# Altium PCB MainBoard.PcbDoc
Units mil, origin at the board's own origin, x right, y up, seen from the top; angles counter-clockwise.
Board outline 1122 x 925 mil, 2 copper layers (Top1, Bottom4), stack 42.17 mil thick; 34 components, 52 nets, 216 pads, 117 vias.
Unrouted connection lines stored in the file: 28.
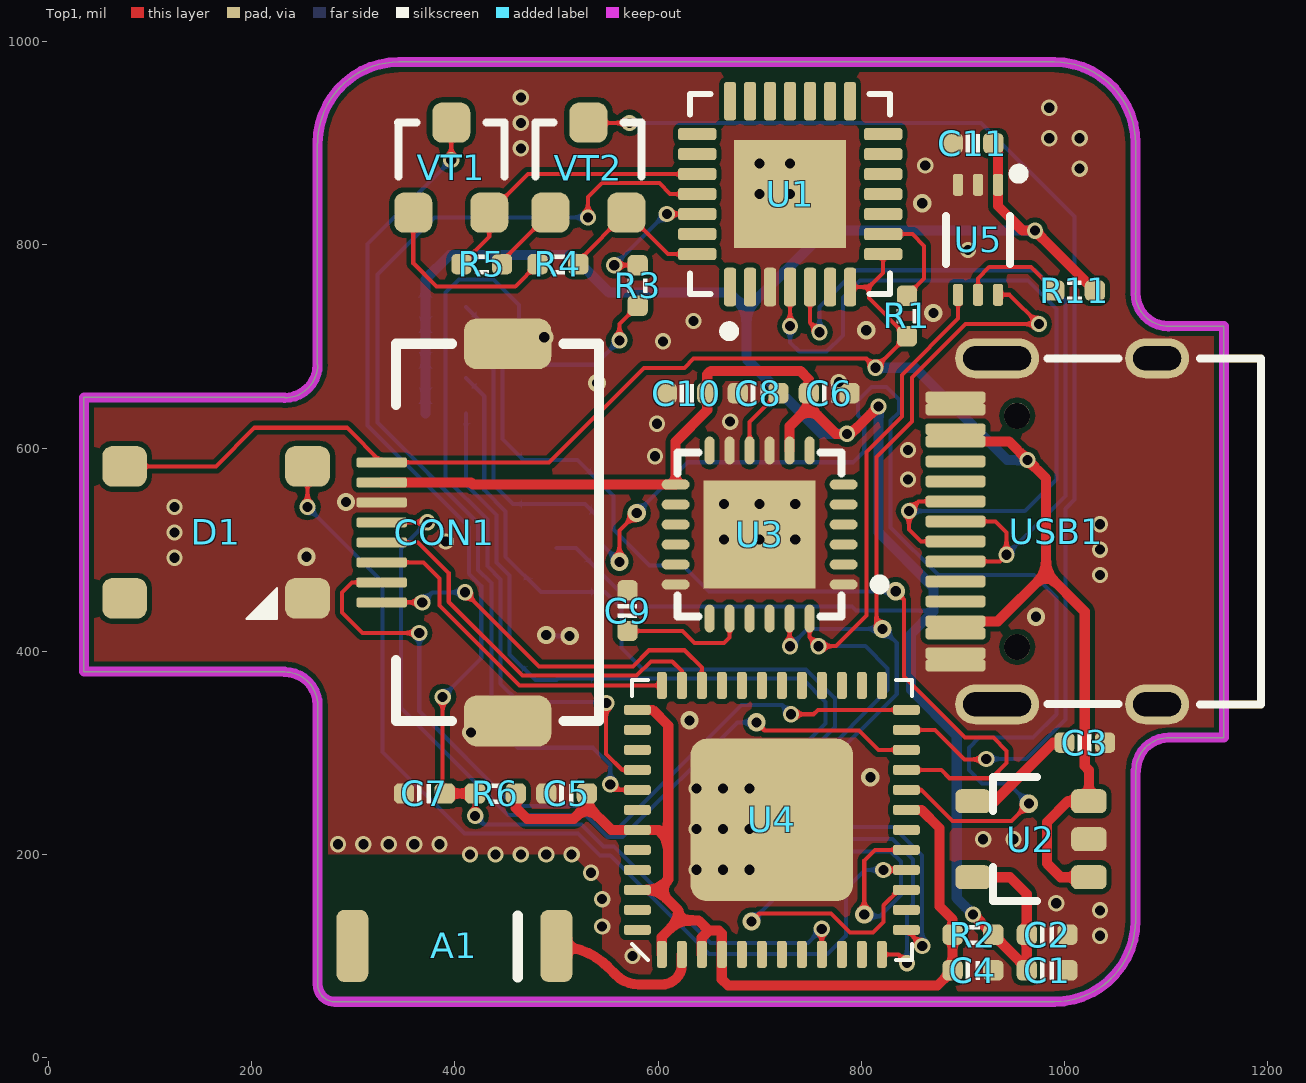
[diagram p0: Top1 view]
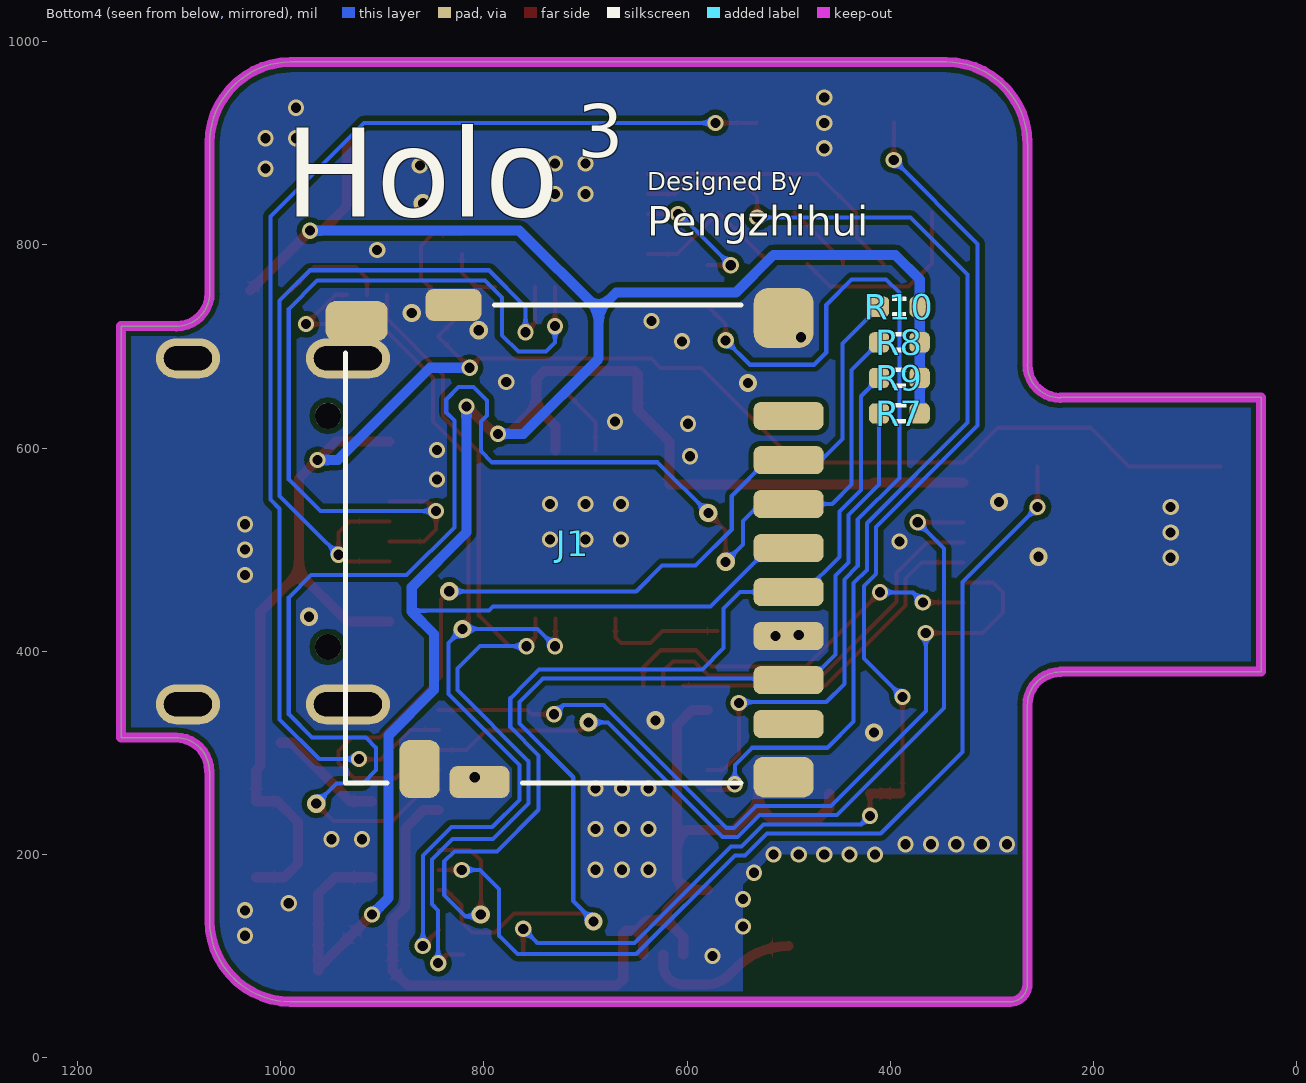
[diagram p1: Bottom4 view, seen from below]
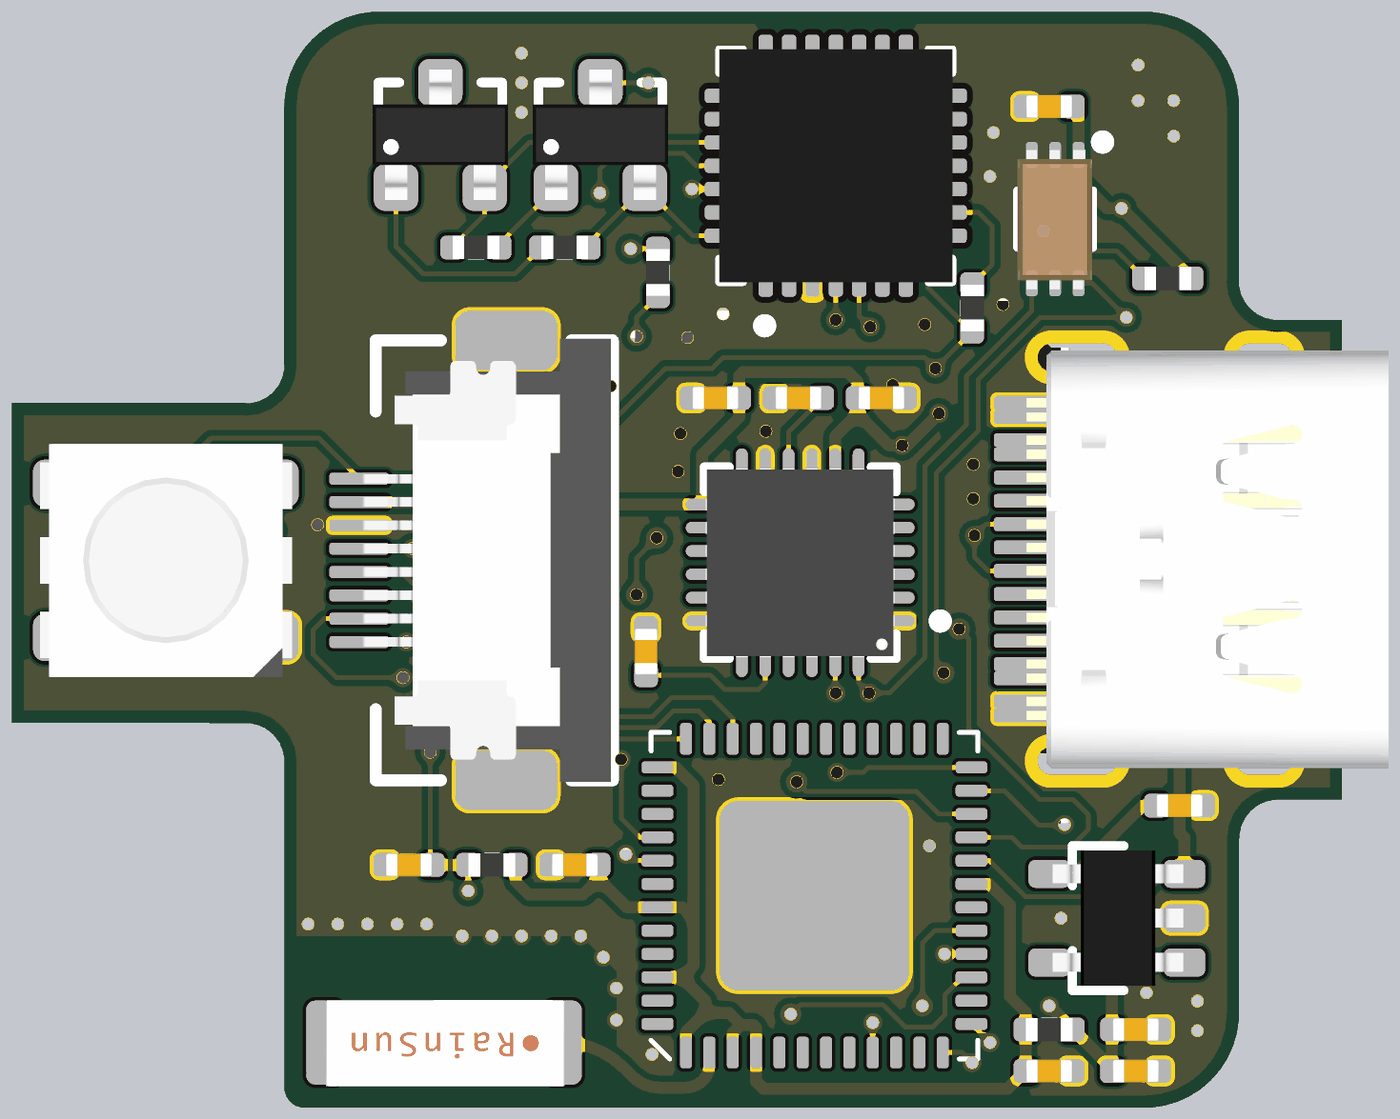
[diagram p2: 3D render of the assembled board from above, using the file's embedded part models]
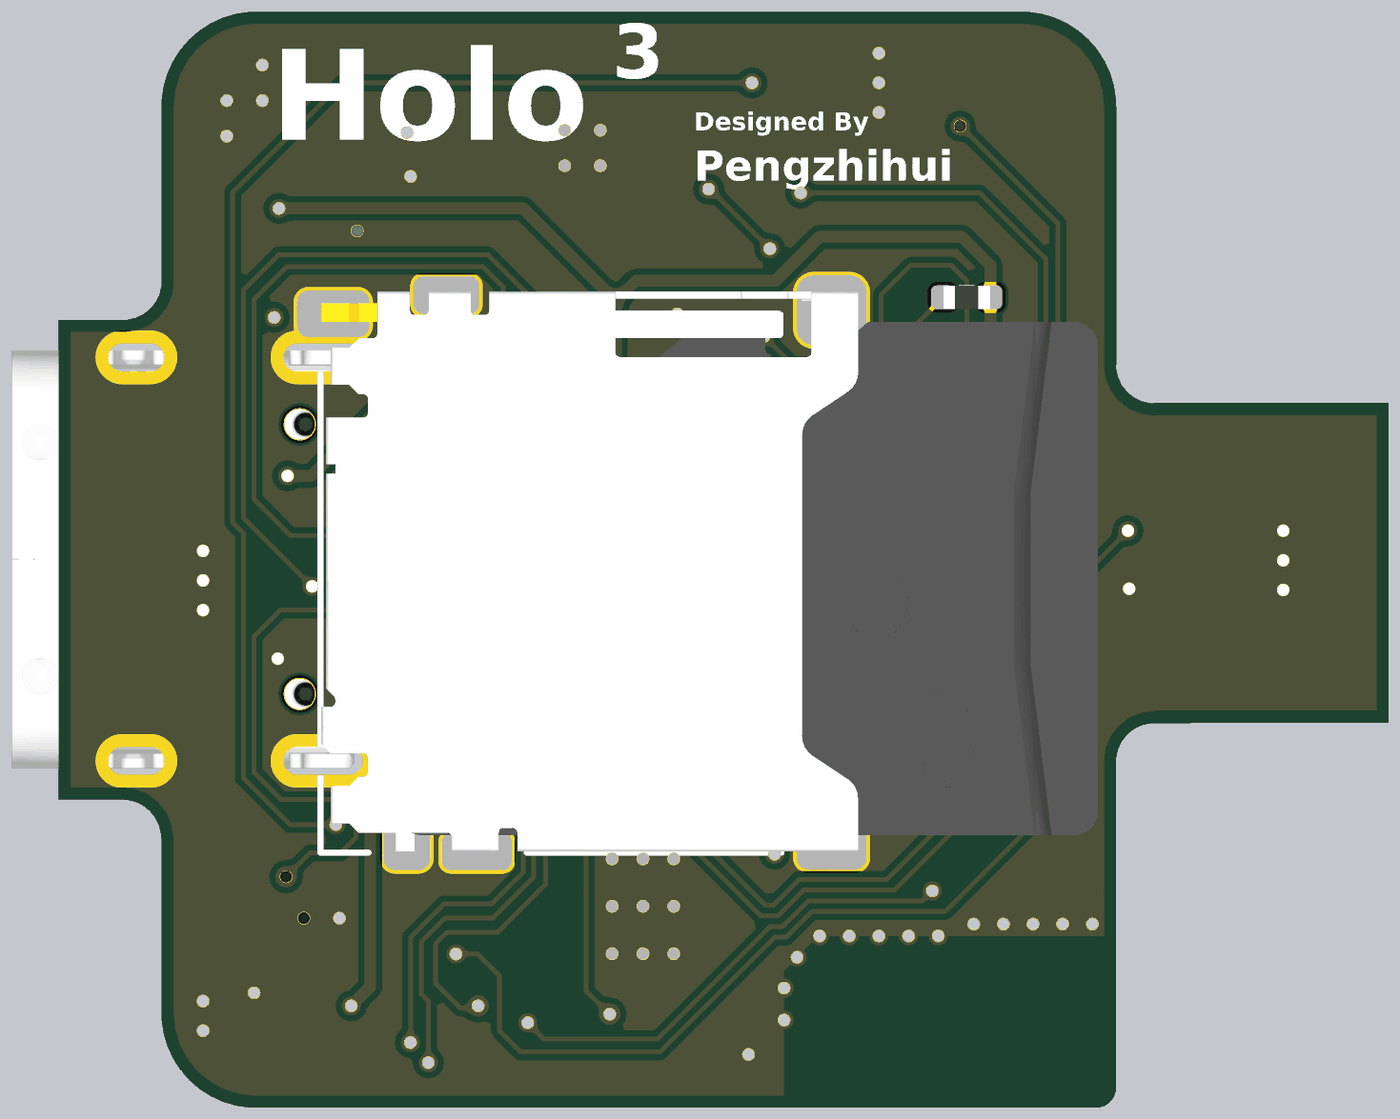
[diagram p3: 3D render of the assembled board from below, using the file's embedded part models]

## Layer stack, top to bottom
Top Solder: solder mask 0.4, Solder Resist, Dk 3.5
Top1: signal copper 1.4
Dielectric 2: core 39.37, PP-006, Dk 4.2
Bottom4: signal copper 1.4
Bottom Solder: solder mask 0.4, Solder Resist, Dk 3.5

## Board outline
232.4,379.6 cw(c232.4,347) 265,347 265,72.07 ccw(c282.07,72.07) 282.07,55 990,55 ccw(c990,135) 1070,135 1070,282.4 1070.4,282.4 cw(c1103,282.4) 1103,315 1157,315 1157,720 1102.5,720 1102.5,719.9 cw(c1102.5,752.5) 1069.9,752.5 1070,752.5 1070,900 ccw(c990,900) 990,980 345,980 ccw(c345,900) 265,900 264.82,900 264.82,682 265,682 cw(c232.4,682) 232.4,649.4 232.4,649.82 35,649.82 35,380

## Design rules (kind name [scope] priority, off if disabled: settings)
Clearance [All] p1: gap=5 ignorepadtopadclearanceinfootprint=FALSE
ComponentClearance [All] p1: gap=0 collisioncheckmode=3 verticalgap=0 showdistances=FALSE
DiffPairsRouting [All] p1: maxlimit=9 minlimit=9 mostfreqgap=9 toplayer_minwidth=4 toplayer_maxwidth=4 toplayer_prefwidth=4 bottomlayer_minwidth=4 bottomlayer_maxwidth=4 bottomlayer_prefwidth=4 maxuncoupledlength=500
FanoutControl Fanout_BGA [All] p1: bgadir=Out bgaviamode=Centered fanoutstyle=Auto fanoutdirection=Alternating viagrid=1 // Fanout_BGA (Default Rule)
HoleSize [All] p1: absolutevalues=TRUE maxlimit=10000 minlimit=8 maxpercent=80.000 minpercent=20.000
MinimumSolderMaskSliver [All] p1 off: minsoldermaskwidth=2
PlaneClearance [All] p1: clearance=8
PlaneConnect [All] p1: planeconnectstyle=Direct reliefexpansion=20 reliefentries=4 reliefconductorwidth=10 reliefairgap=10
PolygonConnect [All] p1: connectstyle=Direct reliefconductorwidth=10 reliefentries=4 polygonreliefangle="90 Angle" airgapwidth=10
RoutingVias [All] p1: holewidth=8 width=16 viastyle="Through Hole" minholewidth=6 minwidth=12 maxholewidth=28 maxwidth=50
SilkToBoardRegionClearance [All] p1 off:
SilkToSilkClearance [All] p1: silktosilkclearance=0
SilkToSolderMaskClearance [IsPad] p1: minsilkscreentomaskgap=0 clearancetoexposedcopper=TRUE
SolderMaskExpansion [All] p1: expansion=3 istentingtop=FALSE
Width [All] p1: maxlimit=10000 minlimit=4 preferedwidth=4
20 further rules are at their usual default settings.

## Classes and differential pairs
net class GND: GND

## Components (designator, comment, footprint, x,y, rotation, side; value= is the part's Value field where it differs from the comment)
A1 "RAINSUN" ANT-Rainsun-AN5120 400,110 r180 top
C1 "0.1uF" CAP_0402 983,86 r180 top value=0.1u
C2 "10uF" CAP_0402 983,121 r180 top value=0.1u
C3 "10nF" CAP_0402 1020,310 r180 top value=0.1u
C4 "10uF" CAP_0402 910,86 r180 top value=0.1u
C5 "0.1uF" CAP_0402 510,260 r0 top value=0.1u
C6 "10nF" CAP_0402 768.5,654 r0 top value=0.1u
C7 "0.1uF" CAP_0402 370,260 r180 top value=0.1u
C8 "0.1uF" CAP_0402 698.5,654 r180 top value=0.1u
C9 "2.2nF" CAP_0402 570,440 r270 top value=0.1u
C10 "0.1uF" CAP_0402 628.5,654 r0 top value=0.1u
C11 "0.1uF" CAP_0402 910,900 r180 top value=0.1u
CON1 "FFC_0.5_8" FFC_0.5_8 417,517 r90 top
D1 "RGB" LED_5050_WS2812B 165,517 r0 top
J1 "TF-Socket" "TF-Card-Amphenol with TF" 500,501.61 r90 bottom locked
R1 "10K" RES_0402 845,730 r90 top value=22R
R2 "0R" RES_0402 910,121 r180 top value=22R
R3 "200R" RES_0402 580,760 r90 top value=22R
R4 "12K" RES_0402 501.5,781 r180 top value=22R
R5 "12K" RES_0402 426.5,781 r0 top value=22R
R6 "10K" RES_0402 440,260 r180 top value=22R
R7 "10K" RES_0402 391,634 r0 bottom value=22R
R8 "10K" RES_0402 391,704 r0 bottom value=22R
R9 "10K" RES_0402 391,669 r0 bottom value=22R
R10 "10K" RES_0402 391,739 r0 bottom value=22R
R11 "10K" RES_0402 1010,755 r0 top value=22R
U1 "CP2102" QFN-28 730,850 r90 top value=Value
U2 "LP2992 3V3" SOT23-5 965,215 r180 top
U3 "MPU6050" QFN-24 700,515 r180 top
U4 "ESP32_SIP" QFN-48_7X7 712,234 r90 top
U5 "BH1750FVI-TR" BH1750FVI 915,805 r270 top
USB1 "Type-C" Type-C-TOP 992,518 r0 top
VT1 "S8050" SMT_TRIODE_NPN 396.5,876 r0 top
VT2 "S8050" SMT_TRIODE_NPN 531.5,876 r0 top

## Footprints (in the part's own frame and the unit in brackets; to place one, negate y for a bottom-side part, rotate by r counter-clockwise, add the part's x,y. Pads: shape width x height; smd on the part's side, far side on the other; paste and mask are expansions set on the pad)
ANT-Rainsun-AN5120 [mm] "选择焊盘"
  rrect50% 0.8x1.8 smd: 1(-2.54,0) ""(2.563,0)
  silkscreen extent -1.57,-0.76 -1.57,0.79, body extent -2.57,-0.91 2.54,0.94, height 1.32
BH1750FVI [mm]
  rrect50% 0.55x0.25 smd paste+0 mask+0: 1(-1.375,0.5) 2(-1.375,0) 3(-1.375,-0.5) 4(1.375,-0.5) 5(1.375,0) 6(1.375,0.5)
  silkscreen extent -1.78,-0.8 0.6,1.14, body extent -1.49,-0.81 1.51,0.79, height 0.77
CAP_0402 [mil]
  rrect50% 20x20 smd: 1(-20,0) 2(20,0)
  silkscreen extent -7,-9 7,9, body extent -20,-10 20,10, height 20
FFC_0.5_8 [mil]
  rrect50% 50x86 smd: 0(-185.63,-35) 0(185.63,-35)
  rrect50% 10x50 smd: 1(-68.9,89) 2(-49.21,89) 3(-29.53,89) 4(-9.84,89) 5(9.84,89) 6(29.53,89) 7(49.21,89) 8(68.9,89)
  silkscreen extent -186,-125 186,75, body extent -187,-124 187,87, height 82
LED_5050_WS2812B [mil]
  rrect50% 44x40 smd: 1(-90,65) 2(-90,-65) 3(90,-65) 4(90,65)
  silkscreen extent 30,-85 60,-55, body extent -106,-98 106,98, height 69
QFN-24 [mm] "QFN, 24-Leads, Body 4.1x4.1mm (max), Pitch 0.50mm, IPC Low Density"
  oval 0.7x0.25 smd: 1(-2.1,1.25) 2(-2.1,0.75) 3(-2.1,0.25) 4(-2.1,-0.25) 5(-2.1,-0.75) 6(-2.1,-1.25) 13(2.1,-1.25) 14(2.1,-0.75) 15(2.1,-0.25) 16(2.1,0.25) 17(2.1,0.75) 18(2.1,1.25)
  oval 0.25x0.7 smd: 7(-1.25,-2.1) 8(-0.75,-2.1) 9(-0.25,-2.1) 10(0.25,-2.1) 11(0.75,-2.1) 12(1.25,-2.1) 19(1.25,2.1) 20(0.75,2.1) 21(0.25,2.1) 22(-0.25,2.1) 23(-0.75,2.1) 24(-1.25,2.1)
  rect 2.8x2.7 smd: ""(0,0)
  silkscreen extent -3.13,-2.05 2.05,2.05, body extent -2.02,-2.02 2.02,2.02, height 0.95
QFN-28 [mil]
  rrect50% 38x12 smd mask+5: 1(-91.5,59.06) 2(-91.5,39.37) 3(-91.5,19.68) 4(-91.5,0) 5(-91.5,-19.69) 6(-91.5,-39.37) 7(-91.5,-59.06) 15(91.5,-59.06) 16(91.5,-39.37) 17(91.5,-19.69) 18(91.5,0) 19(91.5,19.68) 20(91.5,39.37) 21(91.5,59.06)
  rrect50% 12x38 smd mask+5: 8(-59.06,-91.5) 9(-39.37,-91.5) 10(-19.68,-91.5) 11(0,-91.5) 12(19.69,-91.5) 13(39.37,-91.5) 14(59.06,-91.5) 22(59.06,91.5) 23(39.37,91.5) 24(19.69,91.5) 25(0,91.5) 26(-19.68,91.5) 27(-39.37,91.5) 28(-59.06,91.5)
  rect 106.3x110.24 smd: 29(0,0)
  silkscreen extent -140,-98 98,98, body extent -98,-98 98,98, height 35
QFN-48_7X7 [mm]
  rrect20% 4.064x4.064 smd: 0(0,0)
  rrect50% 0.675x0.25 smd: 1(-3.363,2.75) 2(-3.363,2.25) 3(-3.363,1.75) 4(-3.363,1.25) 5(-3.363,0.75) 6(-3.363,0.25) 7(-3.363,-0.25) 8(-3.363,-0.75) 9(-3.363,-1.25) 10(-3.363,-1.75) 11(-3.363,-2.25) 12(-3.363,-2.75) 25(3.363,-2.75) 26(3.363,-2.25) 27(3.363,-1.75) 28(3.363,-1.25) 29(3.363,-0.75) 30(3.363,-0.25) 31(3.363,0.25) 32(3.363,0.75) 33(3.363,1.25) 34(3.363,1.75) 35(3.363,2.25) 36(3.363,2.75)
  rrect50% 0.25x0.675 smd: 13(-2.75,-3.363) 14(-2.25,-3.363) 15(-1.75,-3.363) 16(-1.25,-3.363) 17(-0.75,-3.363) 18(-0.25,-3.363) 19(0.25,-3.363) 20(0.75,-3.363) 21(1.25,-3.363) 22(1.75,-3.363) 23(2.25,-3.363) 24(2.75,-3.363) 37(2.75,3.363) 38(2.25,3.363) 39(1.75,3.363) 40(1.25,3.363) 41(0.75,3.363) 42(0.25,3.363) 43(-0.25,3.363) 44(-0.75,3.363) 45(-1.25,3.363) 46(-1.75,3.363) 47(-2.25,3.363) 48(-2.75,3.363)
  silkscreen extent -3.5,-3.5 3.5,3.5, body extent -3.5,-3.5 3.5,3.5, height 1
RES_0402 [mil]
  rrect50% 20x20 smd: 1(-20,0) 2(20,0)
  silkscreen extent -7,-10 7,10, body extent -20,-10 20,10, height 14
SMT_TRIODE_NPN [mm] "Surface mount NPN transistor, package SOT-23"
  rrect50% 0.95x1 smd: 1(-0.95,-1.125) 2(0.95,-1.125) 3(0,1.125)
  silkscreen extent -1.33,-0.22 1.32,1.13, body extent -1.45,-1.4 1.45,1.4, height 1.3
SOT23-5 [mm] "SOT23, 3-Leads, Body 3.1x3.0mm (max), Pitch 0.95mm, IPC Medium Density"
  rrect50% 0.889x0.6 smd: 1(-1.5,0.95) 2(-1.5,0) 3(-1.5,-0.95) 4(1.396,-0.95) 5(1.396,0.95)
  silkscreen extent -0.2,-1.55 0.9,1.55, body extent -1.48,-1.45 1.32,1.45, height 1.2
"TF-Card-Amphenol with TF" [mm]
  rrect50% 0.7x1.75 smd: 1(3.3,0) 2(2.2,0) 3(1.1,0) 4(0,0) 5(-1.1,0) 6(-2.2,0) 7(-3.3,0) 8(-4.4,0)
  rrect50% 1x1.55 smd: 9(5.675,10.8)
  rrect50% 1.45x1 smd: 10(-5.525,9.225)
  rrect50% 1.5x1.5 smd: S1(5.75,0.125)
  rrect50% 1.016x1.5 smd: S2(-5.727,0.125)
  rrect50% 0.8x1.4 smd: S3(6.075,8.375)
  rrect50% 0.8x1.5 smd: S4(-5.85,7.725)
  silkscreen extent -5.87,1.19 6.07,11.07, body extent -5.85,-5.58 6.15,11.06, height 1.69
Type-C-TOP [mm]
  round 0.65 hole 0.65: 0(-0.98,-2.89) 0(-0.98,2.89)
  oval 1.6x1 hole 0.6 slot 1.2 at 0 deg: 1(2.52,4.325) 2(2.52,-4.325)
  oval 2.1x1 hole 0.6 slot 1.7 at 0 deg: 3(-1.48,-4.325) 4(-1.48,4.325)
  rrect50% 1.5x0.3 smd: A1(-2.52,-3.35) A4(-2.52,-2.55) A5(-2.52,-1.25) A6(-2.52,-0.25) A7(-2.52,0.25) A8(-2.52,1.25) A9(-2.52,2.55) A12(-2.52,3.35) B1(-2.52,3.05) B4(-2.52,2.25) B5(-2.52,1.75) B6(-2.52,0.75) B7(-2.52,-0.75) B8(-2.52,-1.75) B9(-2.52,-2.25) B12(-2.52,-3.05)
  silkscreen extent -0.22,-4.33 5.12,4.33, body extent -2.57,-4.48 5.18,4.48, height 3.26

## Part data
A1: library part ANT-Rainsun-AP5120
C1 C2 C3 C4 C5 C6 C7 C8 C9 C10 C11: library part 电容-0402, "Capacitor"
CON1: "FFC", System=Connector
D1: library part LED_5050_WS2812B, "LED", Type=5050
J1: "10 _8 + 2_ Position Card Connector Secure Digital - microSDâ„¢ Surface Mount, Right Angle Gold", Package=None, Availability=Unavailable, MF="Amphenol Commercial Products", MP=1140084168, Price=None, SnapEDA_Link=https://www.snapeda.com/parts/1140084168/Amphenol/view-part/4544529/?ref=snap
R1 R2 R3 R4 R5 R6 R7 R8 R9 R10 R11: library part 电阻-0402, "Resistor"
U1: "USB转TTL", MFG #1="SILICON LABS", PART DESC="SINGLE-CHIP USB TO UART BRIDGE, QFN28, RoHS.", PART NUMBER=CP2102, RefDes=RefDes, Type=DEV
U2: library part LP2992, "LDO"
U3: "六轴传感器"
U4: library part ESP32-PICO
USB1: library part USB-Type-C-TOP
VT1 VT2: library part SMT_TRIODE_NPN, "Surface mount NPN transistor, package SOT-23"

## Via types
v1: diameter 16, hole 10, Top1 to Bottom4, tented both sides, 96 vias
v2: diameter 18, hole 10, Top1 to Bottom4, tented both sides, 21 vias

## Nets (pads, with @x,y where several pads share a name; then routed paths per layer and width w, separated by ;. In a path a pad name is that pad's centre, name@x,y a point inside that pad or via, vN(x,y) a via of type N, cw(c..) or ccw(c..) an arc to the next point about the centre after c; other vN are vias at no path point)
3V3: C1.2 C2.2 C6.1 C10.2 C11.1 CON1.7 J1.4 R2.1 R7.1 R8.1 R9.1 R10.1 R11.2 U2.5 U3.8 U3.13 U5.1 | length 3015.4
  Top1 w10: CON1.7 415.79,566.21 417.79,564.21 U3.13 617.32,606.32 648.5,637.5 C10.2 648.5,672.5 652,676 740,676 748.5,667.5 C6.1 748.5,640.5 ; U3.8 729.53,621.53 748.5,640.5 ; v1(817,641) 790,614 775,614 748.5,640.5 ; v1(910,141) R2.1 C1.2@963,88 ; U2.5 946.4,177.6 963,161 C2.2 C1.2@963,88 ; C11.1 934.69,895.32 U5.1 934.69,838.32 959,814 v1(971,814) R11.2 ; C1.2 C1.2@963,88
  Bottom4 w4: J1.4 519.39,501.61 577,444 791,444 795,440 871,440
  Bottom4 w10: R7.1 R9.1 R8.1 R10.1 371,766 395,790 515,790 552,753 670,753 687,736 ; v1(786,614) 761,614 687,688 687,736 ; v1(817,641) 817,517 871,463 871,439 849,417 849,362 894,317 894,157 v1(910,141) ; v1(971,814) 765,814 687,736
3V3A: C4.2 C5.2 R2.2 R6.1 U4.1 U4.3 U4.4 U4.19 U4.37 U4.43 U4.46 | length 1041.9
  Top1 w10: R6.1 460,246 471,235 517,235 530,248 ; C5.2 530,248 ; U4.46 599.9,165.1 ; U4.37 594.73,342.27 610,327 610,215 ; U4.1 603.73,118.73 620,135 ; U4.3 643.1,118.1 650,125 ; U4.19 859.16,243.84 877,226 877,149 890,136 R2.2 C4.2 875,71 669,71 662.79,77.21 U4.4 662.79,122.21 660,125 650,125 ; 530,248 553.84,224.16 U4.43 600.84,224.16 610,215 ; 599.9,165.1 610,175.2 610,215 ; 599.9,165.1 620,145 620,135 ; 620,135 640,135 650,125
BH_SCL: U3.23 U4.13 U5.6 | length 1021
  Top1 w4: U3.23 729.53,405.47 v1(730,405) ; v2(821,422) 815,428 815,591 850,626 850,669.27 902.73,722 v1(975,722) 946.13,750.87 U5.6 ; U4.13 v1(860.11,110)
  Bottom4 w4: v1(730,405) 747,422 v2(821,422) 835,408 835,358 765,288 765,253.73 791.73,227 832,227 860,199 860,110.11 v1(860.11,110)
BH_SDA: U3.24 U4.12 U5.4 | length 933.3
  Top1 w4: U3.24 749.21,413.79 v1(758,405) 775,405 805,435 805,596 840,631 840,672 895.32,727.32 U5.4 ; U4.12 836.38,101.62 v1(845,93)
  Bottom4 w4: v1(758,405) 804,405 826,383 826,361.73 756,291.73 756,291 756,250 791,215 831,215 851,195 851,151 845,145 v1(845,93)
CP_Rx: U1.25 U4.41 | length 1036.9
  Top1 w4: v1(531,827) 531,847 544.69,860.69 601.32,860.69 612,850 U1.25 ; v1(553,269) 558.47,263.53 U4.41
  Bottom4 w4: v1(531,827) 380,827 324,771 324,625 423,526 423,480 436,467 436,364.27 436,331 462,305 536,305 553,288 v1(553,269)
CP_Tx: R3.1 U4.40 | length 896.5
  Top1 w4: v1(549,349) 549,299 564.79,283.21 U4.40 ; v1(562,706) 562,722 R3.1
  Bottom4 w4: v1(549,349) 548,350 463,350 445,368 445,470.73 432,483.73 432,529.73 391,570.73 391,753 404,766 438,766 463,741 463,694 475,682 538,682 v1(562,706)
DC: CON1.5 U4.22 | length 846.9
  Top1 w4: CON1.5 372.84,526.84 v1(373,527) ; v2(697,330) 705,322 798,322 817.1,302.9 U4.22
  Bottom4 w4: v1(373,527) 347,501 347,344 452.36,238.64 528.63,238.64 550.27,217 565,217 678,330 v2(697,330)
DTR: R4.1 U1.28 VT2.2 | length 156.8
  Top1 w4: R4.1 521.5,784.31 VT2.2 609.67,790.94 U1.28
EN: C7.1 R6.2 U4.9 VT1.3 | length 1233.3
  Top1 w4: v1(388,355) 388,262 C7.1 ; v1(396.5,883.5) VT1.3 ; v1(420,238) R6.2 ; U4.9 v1(761.21,126.79)
  Top1 w10: C7.1 R6.2
  Bottom4 w4: v1(388,355) 405,372 426,393 426,464.27 414,476.27 414,479 414,522.27 314,622.27 314,801 v1(396.5,883.5) ; v1(420,238) 428.36,229.64 524.9,229.64 546.54,208 556.73,208 651.73,113 747.43,113 v1(761.21,126.79)
FLASH_CLK: U4.31
FLASH_CS: U4.25
FLASH_SD0: U4.27
FLASH_SD1: U4.33
FLASH_SD2: U4.30
FLASH_SD3: U4.32
GND: C1.1 C2.1 C3.1 C4.1 C5.1 C6.2 C7.2 C8.2 C9.1 C10.1 C11.2 CON1.0 CON1.6 D1.3 J1.6 J1.9 J1.10 J1.S1 J1.S2 J1.S3 J1.S4 U1.3 U1.29 U2.2 U3. U3.1 U3.9 U3.11 U3.18 U4.0 U5.2 U5.3 USB1.1 USB1.2 USB1.3 USB1.4 USB1.A1 USB1.A12 USB1.B1 USB1.B12 | length 13
  Bottom4 w4: J1.6 v2(513,415)
  other v1: 575,100 1035,120 545,129 1035,145 992,152 545,156 534,182 638,185 664,185 690,185 415,200 440,200 465,200 490,200 515,200 285,210 310,210 335,210 360,210 385,210 920,215 950,215 638,225 664,225 690,225 638,265 664,265 690,265 1035,475 124,492 1035,500 391,508 665,510 700,510 735,510 124,517 1035,525 124,542 665,545 700,545 735,545 846,569 597,592 846,598 599,624 671,626 778,665 605,705 635,725 905,795 700,850 730,850 1015,875 863,878 700,880 730,880 465,895 985,905 1015,905 465,920 985,935 465,945
  other v2: 809,276 416,320 631,332 490,416 972,434 254,493 293,547 540,664 488,709 805,716 871,733 860,841
GPIO0: U4.23 VT2.3 | length 1200.5
  Top1 w4: VT2.3 531.79,920 v1(572,920) ; U4.23 872.42,322.58 901.5,293.5 922.5,293.5 v1(923,294)
  Bottom4 w4: v1(572,920) 918,920 1010,828 1010,549.27 1001,540.27 1001,333 962,294 v1(923,294)
GPIO4: CON1.2 U4.24 | length 807
  Top1 w4: CON1.2 298.79,467.79 289,458 289,438 309,418 v1(365,418) ; v1(731,338) 753,338 757.27,342.27 U4.24
  Bottom4 w4: v1(365,418) 365,341 458.36,247.64 532.36,247.64 554,226 561,226 682,347 722,347 v1(731,338)
GPIO5: CON1.1 U4.34 | length 380.7
  Top1 w4: CON1.1 v1(367.9,448.1) ; v1(410,458) 483,385 575.27,385 591.27,401 626,401 643.1,383.9 U4.34
  Bottom4 w4: v1(367.9,448.1) 377.8,458 v1(410,458)
GPIO9: U4.28
GPIO10: U4.29
GPIO12: U4.18
GPIO13: J1.3 R8.2 U4.20 | length 1497.8
  Top1 w4: v2(562,488) 562,519 v2(579,536) ; U4.20 859.47,263.53 890,233 948,233 v2(965,250)
  Bottom4 w4: R8.2 438,677 438,564 457.08,544.92 J1.3 528.08,544.92 545,528 545,505 v2(562,488) ; v2(579,536) 629,586 792,586 803,597 803,626 797,632 797,647 810,660 825,660 837,648 837,635 829,627 829,521.97 875.97,475 970,475 992,453 992,338 969,315 916,315 906,305 906,283 919,270 945,270 v2(965,250)
GPIO14: J1.5 R9.2 U4.17 | length 1009.4
  Top1 w4: v2(803,141) 803,194 813.47,204.47 U4.17
  Bottom4 w4: R9.2 429,651 429,558.73 450,537.73 450,493 484.69,458.31 J1.5 547.69,458.31 564,442 564,403 585,382 723,382 745.73,382 758,369.73 774,353.73 774,325.27 746,297.27 746,244 787,203 829,203 839,193 839,160 818,139 805,139 v2(803,141)
GPIO15: J1.2 R10.2 U4.21 | length 952.2
  Top1 w4: v2(834,459) 842,451 842,375 902,315 930,315 943,302 943,290 928,275 887,275 878.79,283.21 U4.21
  Bottom4 w4: R10.2 447,703 447,609 467.77,588.23 J1.2 520.77,588.23 556,553 556,520 591.5,484.5 624.5,484.5 650,459 v2(834,459)
GPIO18: CON1.4 U4.35 | length 390.2
  Top1 w4: CON1.4 363.84,507.16 394,477 394,448.73 466.73,376 579,376 593,390 614,390 623.42,380.58 U4.35
GPIO19: U4.38
GPIO21: U4.42
GPIO22: U4.39
GPIO23: CON1.3 U4.36 | length 341.6
  Top1 w4: CON1.3 369.28,487.47 385,471.75 385,445 386,444 463.62,366.38 U4.36
GPIO25: U4.14
GPIO26: J1.7 R7.2 U4.15 | length 1023.2
  Top1 w4: v2(692,134) 699.79,141.79 770.21,141.79 789,123 811.63,123 822,133.37 822,150 837.1,165.1 U4.15
  Bottom4 w4: R7.2 411,564 441,534 441,487.46 454,474.46 454,470.73 454,397 479.31,371.69 J1.7 501.31,373 742,373 765,350 765,329 712,276 712,154 v2(692,134)
GPIO27: D1.4 U4.16 | length 970.7
  Top1 w4: v1(255,542) D1.4 ; v1(821.79,184.79) U4.16
  Bottom4 w4: v1(255,542) 329,468 329,301 409.36,220.64 521.17,220.64 542.82,199 553,199 650,102 767,102 785,120 785,166 803.79,184.79 v1(821.79,184.79)
GPIO34: U4.10
GPIO35: U4.11
GPIO37: U4.6
GPIO38: U4.7
NetA1_1: A1.1 U4.2 | length 155.9
  Top1 w10: A1.1 cw(c500,37.57) 551.21,88.79 558.81,81.19 ccw(c581,103.38) 581,72 603.51,72 ccw(c603.51,92.49) 618,78 ccw(c604.92,91.08) 623.42,91.08 U4.2
NetC3_2: C3.2 U2.4 | length 113.8
  Top1 w10: U2.4 931.4,252.4 989,310 C3.2
NetC8_1: C8.1 U3.10 | length 68.1
  Top1 w4: U3.10 690.16,625.66 C8.1
NetC9_2: C9.2 U3.20 | length 126.6
  Top1 w4: C9.2 624,420 636,408 665,408 670.47,413.47 U3.20
NetR1_2: R1.2 U1.9 | length 101.4
  Top1 w4: U1.9 850.37,810.63 862,799 862,767 R1.2
NetR3_2: R3.2 U1.26 | length 125.3
  Top1 w4: v1(557,780) R3.2 ; v1(608.69,830.32) U1.26
  Bottom4 w4: v1(557,780) 607.32,830.32 v1(608.69,830.32)
NetR4_2: R4.2 VT1.1 | length 190.8
  Top1 w4: VT1.1 359.1,781.9 382,759 459.5,759 R4.2
NetR5_2: R5.2 VT2.1 | length 70.4
  Top1 w4: R5.2 446.5,784.11 VT2.1
NetR11_1: R11.1 U5.5 | length 105.2
  Top1 w4: U5.5 915,767 926,778 967,778 R11.1
RTS: R5.1 U1.24 VT1.2 | length 282.4
  Top1 w4: R5.1 433.9,808.4 VT1.2 471.88,869.69 U1.24
SENSOR_VN: U4.8
SENSOR_VP: U4.5
USB-PWR-DM: U1.5 USB1.A7 USB1.B7 | length 746.3
  Top1 w4: U1.5 749.69,723.32 v1(759,714) ; USB1.B7 936.47,488.47 v1(943,495) 943,517 932.16,527.84 USB1.A7
  Bottom4 w4: v1(759,714) 759,739 795,775 971,775 1001,745 1001,553 965,517 v1(943,495)
USB-PWR-DP: U1.4 USB1.A6 USB1.B6 | length 826.8
  Top1 w4: v1(730,720) U1.4 ; USB1.A6 858.84,508.16 846.99,520.01 v1(846.99,537.99) 856.53,547.53 USB1.B6
  Bottom4 w4: v1(730,720) 730,704 739,695 766,695 782,711 782,748 799,765 964,765 992,737 992,569 960.99,537.99 v1(846.99,537.99)
VDD_5V: CON1.8 D1.1 R1.1 U1.7 U1.8 U2.1 U2.3 USB1.A4 USB1.A9 USB1.B4 USB1.B9 | length 1852.1
  Top1 w4: D1.1 165,582 203,620 293.9,620 CON1.8 492.9,585.9 586,679 626,679 635,688 805,688 v1(814,679) R1.1 807.5,747.5 807.5,758.5 ; U1.7 807.5,758.5 ; U1.8 821.5,772.5 807.5,758.5
  Top1 w10: USB1.B9 934.42,429.42 982,477 ; USB1.B4 945.42,606.58 v1(963.71,588.29) 982,570 982,477 ; U2.1 996.4,177.6 983,191 983,232 1003.4,252.4 U2.3 1024.06,282.94 1020,287 1020,439 982,477
  Bottom4 w10: v1(814,679) 853,679 943.71,588.29 v1(963.71,588.29)
pads on no net: A1. D1.2 J1.1 J1.8 U1.1 U1.2 U1.6 U1.10 U1.11 U1.12 U1.13 U1.14 U1.15 U1.16 U1.17 U1.18 U1.19 U1.20 U1.21 U1.22 U1.23 U1.27 U3.2 U3.3 U3.4 U3.5 U3.6 U3.7 U3.12 U3.14 U3.15 U3.16 U3.17 U3.19 U3.21 U3.22 U4.26 U4.44 U4.45 U4.47 U4.48 USB1.0 USB1.A5 USB1.A8 USB1.B5 USB1.B8

## Polygon pours and split planes (outlines as drawn)
GND on Top1 "GND_L01_P000" (solid, remove dead copper, pour order 0): 35,980 1155,980 1155,55 35,55
GND on Bottom4 "GND_L02_P001" (solid, remove dead copper, pour order 1): 35,980 1155,980 1155,55 35,55

## Keep-outs
Keep-Out Layer:
  lines w10: 232.4,379.6 cw(c232.4,347) 265,347 265,72.07 ccw(c282.07,72.07) 282.07,55 990,55 ccw(c990,135) 1070,135 1070,282.4 ; 232.4,380 35,380 35,649.82 232.4,649.82 ; 232.4,649.4 ccw(c232.4,682) 265,682 ; 264.82,682 264.82,900 ; 265,900 cw(c345,900) 345,980 990,980 cw(c990,900) 1070,900 1070,752.5 ; 1069.9,752.5 ccw(c1102.5,752.5) 1102.5,719.9 ; 1070.4,282.4 cw(c1103,282.4) 1103,315 1157,315 1157,720 1102.5,720

## Other copper
Top1:
  pour cut-out: 250,200 515,200 545,170 545,35 250,35
Bottom4:
  pour cut-out: 250,200 516.25,200 545,170 545,35 250,35

## Silkscreen, mask and mechanical layers (free items; w line width, h text height)
Bottom Overlay:
  text "3" at 708,869 h90
  text "Designed By" at 639,848 h30
  text "Pengzhihui" at 639,799 h50
  text "Holo" at 996,799 h150
Drill Drawing:
  circle w10: c110.62,1982.28 r33.33
  lines w10: 77.29,1498.94 110.62,1515.61 143.96,1498.94 127.29,1532.28 143.96,1565.61 110.62,1548.94 77.29,1565.61 93.96,1532.28 77.29,1498.94 ; 77.29,1715.61 143.96,1715.61 110.62,1648.94 77.29,1715.61 ; 77.29,1798.94 143.96,1798.94 143.96,1865.61 77.29,1865.61 77.29,1798.94
  lines w15: 17.5,1453.94 13225.79,1453.94 ; 17.5,2053.94 13225.79,2053.94 ; 568.38,1303.94 568.38,2203.94 ; 1158.22,1303.94 1158.22,2203.94 ; 2257.9,1303.94 2257.9,2203.94 ; 2763.78,1303.94 2763.78,2203.94 ; 3497.58,1303.94 3497.58,2203.94 ; 4687.23,1303.94 4687.23,2203.94 ; 5277.08,1303.94 5277.08,2203.94 ; 6022.88,1303.94 6022.88,2203.94 ; 7212.53,1303.94 7212.53,2203.94 ; 8066.29,1303.94 8066.29,2203.94 ; 9399.9,1303.94 9399.9,2203.94 ; 10733.51,1303.94 10733.51,2203.94 ; 11823.19,1303.94 11823.19,2203.94 ; 17.5,1303.94 13225.79,1303.94 13225.79,2203.94 17.5,2203.94 17.5,1303.94
  text "Symbol" at 107.5,2098.94 h72
  text "Count" at 613.38,2098.94 h72
  text "Hole Size" at 1203.22,2098.94 h72
  text "Plated" at 2302.9,2098.94 h72
  text "Hole Type" at 2808.78,2098.94 h72
  text "Drill Layer Pair" at 3542.58,2098.94 h72
  text "Via/Pad" at 4732.23,2098.94 h72
  text "Pad Shape" at 5322.08,2098.94 h72
  text "Template" at 6067.88,2098.94 h72
  text "Description" at 7257.53,2098.94 h72
  text "Hole Tolerance (+)" at 8111.29,2098.94 h72
  text "Hole Tolerance (-)" at 9444.9,2098.94 h72
  text "Hole Length" at 10778.51,2098.94 h72
  text "Routed Path Length" at 11868.19,2098.94 h72
  text "2" at 613.38,1948.94 h60
  text "23.62mil (0.600mm)" at 1203.22,1948.94 h60
  text "PTH" at 2302.9,1948.94 h60
  text "Slot" at 2808.78,1948.94 h60
  text "Top1 - Bottom4" at 3542.58,1948.94 h60
  text "Pad" at 4732.23,1948.94 h60
  text "Rounded" at 5322.08,1948.94 h60
  text "r160_100h60_120r100" at 6067.88,1948.94 h60
  text "47.24mil (1.200mm)" at 10778.51,1948.94 h60
  text "23.62mil (0.600mm)" at 11868.19,1948.94 h60
  text "2" at 613.38,1798.94 h60
  text "23.62mil (0.600mm)" at 1203.22,1798.94 h60
  text "PTH" at 2302.9,1798.94 h60
  text "Slot" at 2808.78,1798.94 h60
  text "Top1 - Bottom4" at 3542.58,1798.94 h60
  text "Pad" at 4732.23,1798.94 h60
  text "Rounded" at 5322.08,1798.94 h60
  text "r210_100h60_170r100" at 6067.88,1798.94 h60
  text "66.93mil (1.700mm)" at 10778.51,1798.94 h60
  text "43.31mil (1.100mm)" at 11868.19,1798.94 h60
  text "2" at 613.38,1648.94 h60
  text "25.59mil (0.650mm)" at 1203.22,1648.94 h60
  text "PTH" at 2302.9,1648.94 h60
  text "Round" at 2808.78,1648.94 h60
  text "Top1 - Bottom4" at 3542.58,1648.94 h60
  text "Pad" at 4732.23,1648.94 h60
  text "Rounded" at 5322.08,1648.94 h60
  text "c65h65" at 6067.88,1648.94 h60
  text "-" at 10778.51,1648.94 h60
  text "-" at 11868.19,1648.94 h60
  text "117" at 613.38,1498.94 h60
  text "10.00mil (0.254mm)" at 1203.22,1498.94 h60
  text "PTH" at 2302.9,1498.94 h60
  text "Round" at 2808.78,1498.94 h60
  text "Top1 - Bottom4" at 3542.58,1498.94 h60
  text "Via" at 4732.23,1498.94 h60
  text "Rounded" at 5322.08,1498.94 h60
  text "(Mixed)" at 6067.88,1498.94 h60
  text "-" at 10778.51,1498.94 h60
  text "-" at 11868.19,1498.94 h60
  text "123 Total" at 613.38,1348.94 h60
  text "Slot definitions :" at 107.5,1203.97 h60
  text "Routed Path Length" at 1140.19,1203.97 h60
  text "= Calculated from tool start centre position to tool end centre position." at 2242.86,1203.97 h60
  text "Hole Length" at 1140.19,1103.99 h60
  text "= Routed Path Length + Tool Size = Slot length as defined in the PCB layout" at 1832.99,1103.99 h60